# EAGLE board CT_schematic (EAGLE 7.6.0)

Size 100 x 80 mm. Coordinates in mm from the lower left corner, seen from the top.
Outline: 0,0 100,0 100,80 0,80 0,0
Copper layers (1*16): Top 0.035mm / dielectric 1.5mm / Bottom 0.035mm
Design rules "default": minimum track width 10mil, minimum drill 24mil, track to track 8mil, track to pad 8mil, pad to pad 8mil, via to via 8mil, smd to smd 8mil, copper to edge 40mil, drill to drill 8mil, minimum pad ring 10mil, minimum via ring 8mil, stop-mask expansion 4mil, vias tented up to drill 0mil, thermal gap 10mil

## Footprints (pad centres in the part's own frame; a part is rotated, then mirrored left to right if it is on the bottom)
C0603 = smd 0.8 x 0.8: 1 -0.762,0; 2 0.762,0
C0402 = smd 0.5 x 0.5: 1 -0.508,0; 2 0.508,0
C1206 = smd 1.3 x 1.6: 1 -1.524,0; 2 1.524,0
C0805 = smd 1.2 x 1.3: 1 -1.016,0; 2 1.016,0
C1210 = smd 1.2 x 2.5: 1 -1.524,0; 2 1.524,0
EXV-9H = smd 3.505 x 1.676: 1 -2.857,0; 2 2.857,0
L0603 = smd 0.8 x 0.8: 1 -0.762,0; 2 0.762,0
PJ-037B_PACKAGE = drill 3.7 square: 1 12,0 | drill 3.2 square: 2 6,0
R0603 = smd 0.8 x 0.8: 1 -0.762,0; 2 0.762,0
UFBGA100 = smd 0.28 x 0.28: A1 -2.75,2.75; A2 -2.25,2.75; A3 -1.75,2.75; A4 -1.25,2.75; A5 -0.75,2.75; A6 -0.25,2.75; A7 0.25,2.75; A8 0.75,2.75; A9 1.25,2.75; A10 1.75,2.75; A11 2.25,2.75; A12 2.75,2.75; B1 -2.75,2.25; B2 -2.25,2.25; B3 -1.75,2.25; B4 -1.25,2.25; B5 -0.75,2.25; B6 -0.25,2.25; B7 0.25,2.25; B8 0.75,2.25; B9 1.25,2.25; B10 1.75,2.25; B11 2.25,2.25; B12 2.75,2.25; C1 -2.75,1.75; C2 -2.25,1.75; C3 -1.75,1.75; C4 -1.25,1.75; C5 -0.75,1.75; C8 0.75,1.75; C9 1.25,1.75; C10 1.75,1.75; C11 2.25,1.75; C12 2.75,1.75; D1 -2.75,1.25; D2 -2.25,1.25; D3 -1.75,1.25; D10 1.75,1.25; D11 2.25,1.25; D12 2.75,1.25; E1 -2.75,0.75; E2 -2.25,0.75; E3 -1.75,0.75; E10 1.75,0.75; E11 2.25,0.75; E12 2.75,0.75; F1 -2.75,0.25; F2 -2.25,0.25; F11 2.25,0.25; F12 2.75,0.25; G1 -2.75,-0.25; G2 -2.25,-0.25; G11 2.25,-0.25; G12 2.75,-0.25; H1 -2.75,-0.75; H2 -2.25,-0.75; H3 -1.75,-0.75; H10 1.75,-0.75; H11 2.25,-0.75; H12 2.75,-0.75; J1 -2.75,-1.25; J2 -2.25,-1.25; J3 -1.75,-1.25; J10 1.75,-1.25; J11 2.25,-1.25; J12 2.75,-1.25; K1 -2.75,-1.75; K2 -2.25,-1.75; K3 -1.75,-1.75; K4 -1.25,-1.75; K5 -0.75,-1.75; K8 0.75,-1.75; K9 1.25,-1.75; K10 1.75,-1.75; K11 2.25,-1.75; K12 2.75,-1.75; L1 -2.75,-2.25; L2 -2.25,-2.25; L3 -1.75,-2.25; L4 -1.25,-2.25; L5 -0.75,-2.25; L6 -0.25,-2.25; L7 0.25,-2.25; L8 0.75,-2.25; L9 1.25,-2.25; L10 1.75,-2.25; L11 2.25,-2.25; L12 2.75,-2.25; M1 -2.75,-2.75; M2 -2.25,-2.75; M3 -1.75,-2.75; M4 -1.25,-2.75; M5 -0.75,-2.75; M6 -0.25,-2.75; M7 0.25,-2.75; M8 0.75,-2.75; M9 1.25,-2.75; M10 1.75,-2.75; M11 2.25,-2.75; M12 2.75,-2.75
SOIC-8 = smd 1.6 x 0.6: 1 -2.7,1.905 | smd 1.55 x 0.6: 2 -2.7,0.635; 3 -2.7,-0.635; 4 -2.7,-1.905; 5 2.7,-1.905; 6 2.7,-0.635; 7 2.7,0.635; 8 2.7,1.905
SAMTEC_FTSH-105-01-L-DV-K = smd 0.762 x 2.794: 1 -2.54,-2.032; 2 -2.54,2.032; 3 -1.27,-2.032; 4 -1.27,2.032; 5 0,-2.032; 6 0,2.032; 7 1.27,-2.032; 8 1.27,2.032; 9 2.54,-2.032; 10 2.54,2.032
QFN-32 = smd 0.6 x 0.3: 1 -2.3,1.75; 2 -2.3,1.25; 3 -2.3,0.75; 4 -2.3,0.25; 5 -2.3,-0.25; 6 -2.3,-0.75; 7 -2.3,-1.25; 8 -2.3,-1.75; 17 2.3,-1.75; 18 2.3,-1.25; 19 2.3,-0.75; 20 2.3,-0.25; 21 2.3,0.25; 22 2.3,0.75; 23 2.3,1.25; 24 2.3,1.75 | smd 0.3 x 0.6: 9 -1.75,-2.3; 10 -1.25,-2.3; 11 -0.75,-2.3; 12 -0.25,-2.3; 13 0.25,-2.3; 14 0.75,-2.3; 15 1.25,-2.3; 16 1.75,-2.3; 25 1.75,2.3; 26 1.25,2.3; 27 0.75,2.3; 28 0.25,2.3; 29 -0.25,2.3; 30 -0.75,2.3; 31 -1.25,2.3; 32 -1.75,2.3 | smd 3.2 x 3.2: EXP 0,0
SJ-43515TS-SMT-TR = smd 2.2 x 3: 1 0.6,-7.4; 4 3.4,-7.4 | smd 3 x 3: 2 12.8,-7.4; 5 17,-3 | smd 2 x 3: 3 5.3,0; 6 2.5,0 | drill 1.8: P$7 4.5,-3.69; P$8 11.54,-3.69
WM-64PC = drill 0.6 pad 1: 1 -1,0.95; 2 -1,-0.95
ASEK = smd 1.4 x 1: 1 -1.1,-0.8; 2 1.1,-0.8; 3 1.1,0.8; 4 -1.1,0.8
ASFL1 = smd 1.7 x 1.5: 1 -1.27,-1.1; 2 1.27,-1.1; 3 1.27,1.1; 4 -1.27,1.1
WSON-8 = smd 0.3 x 0.6: 1 -0.75,0; 2 0.05,0; 3 0.85,0; 4 1.65,0; 5 1.65,3.8; 6 0.85,3.8; 7 0.05,3.8; 8 -0.75,3.8 | smd 3 x 2.6: PAD 0.45,1.9
SON-6 = smd 0.55 x 0.3: 1 -0.355,0.5 | smd 0.52 x 0.3: 2 -0.37,0; 3 -0.37,-0.5; 4 0.37,-0.5; 5 0.37,0; 6 0.37,0.5
SW_4-1437565-2 = smd 1.4 x 2.1: 1 -2.23,4.55; 2 -2.23,-4.55; 3 2.23,4.55; 4 2.23,-4.55
LGM67K-G1J2-24-Z = smd 0.8 x 1.4: A -2,0; C 0,0
NC7SZ125M5X = smd 1.3 x 0.7: 1 -1.3,0.95; 2 -1.3,0; 3 -1.3,-0.95; 4 1.3,-0.95; 5 1.3,0.95
DUMMY_PACKAGE_172 = drill 0.3: 1 0,-1; 2 1.5,-1; 3 3,-1

## Placement (x,y rotation side)
C1  1e-07  [C0603]  -73.66,73.66 0 top  (outside the outline)
C2  1e-07  [C0603]  -77.47,73.66 0 top  (outside the outline)
C3  1e-07  [C0603]  -81.28,73.66 0 top  (outside the outline)
C4  1e-07  [C0603]  -15.24,78.74 0 top  (outside the outline)
C5  1e-07  [C0603]  -19.05,78.74 0 top  (outside the outline)
C6  4.7e-06  [C0603]  -69.85,73.66 0 top  (outside the outline)
C7  1e-07  [C0603]  -22.86,78.74 0 top  (outside the outline)
C8  1e-08  [C0603]  -26.67,78.74 0 top  (outside the outline)
C9  1e-06  [C0603]  -30.48,78.74 0 top  (outside the outline)
C10  1e-08  [C0402]  -38.1,83.82 0 top  (outside the outline)
C11  1e-07  [C0402]  -41.91,83.82 0 top  (outside the outline)
C12  1e-06  [C0603]  -34.29,78.74 0 top  (outside the outline)
C13  1e-06  [C0603]  -38.1,78.74 0 top  (outside the outline)
C14  1e-06  [C0603]  -41.91,78.74 0 top  (outside the outline)
C15  1e-06  [C0603]  -45.72,78.74 0 top  (outside the outline)
C16  1e-06  [C0603]  -49.53,78.74 0 top  (outside the outline)
C17  1e-06  [C0603]  -53.34,78.74 0 top  (outside the outline)
C18  1e-06  [C0603]  -57.15,78.74 0 top  (outside the outline)
C19  1e-07  [C0402]  -45.72,83.82 0 top  (outside the outline)
C20  1e-07  [C0402]  -49.53,83.82 0 top  (outside the outline)
C21  1e-07  [C0402]  -53.34,83.82 0 top  (outside the outline)
C22  1e-07  [C0402]  -57.15,83.82 0 top  (outside the outline)
C23  1e-06  [C0603]  -60.96,78.74 0 top  (outside the outline)
C24  1e-08  [C0402]  -60.96,83.82 0 top  (outside the outline)
C25  1e-08  [C0402]  -64.77,83.82 0 top  (outside the outline)
C26  1e-08  [C0402]  -68.58,83.82 0 top  (outside the outline)
C27  1e-08  [C0402]  -72.39,83.82 0 top  (outside the outline)
C28  1e-05  [C1206]  -45.72,66.04 0 top  (outside the outline)
C29  1e-05  [C0805]  -69.85,66.04 0 top  (outside the outline)
C30  1e-08  [C0402]  -76.2,83.82 0 top  (outside the outline)
C31  1e-05  [C1206]  -52.07,66.04 0 top  (outside the outline)
C32  1e-05  [C1210]  -39.37,66.04 0 top  (outside the outline)
C33  1e-07  [C0402]  -80.01,83.82 0 top  (outside the outline)
C34  0.0001  [EXV-9H]  -73.66,57.15 0 top  (outside the outline)
C35  0.0001  [EXV-9H]  -17.78,67.31 0 top  (outside the outline)
C36  1e-08  [C0402]  -15.24,88.9 0 top  (outside the outline)
C37  1e-08  [C0402]  -19.05,88.9 0 top  (outside the outline)
F1  240.0  [L0603]  -64.77,78.74 0 top  (outside the outline)
J1  PJ-037B  [PJ-037B_PACKAGE]  -27.94,35.56 0 top  (outside the outline)
R2  1000.0  [R0603]  -68.58,78.74 0 top  (outside the outline)
R4  4700.0  [R0603]  -72.39,78.74 0 top  (outside the outline)
R5  10000.0  [R0603]  -25.4,73.66 0 top  (outside the outline)
R6  10000.0  [R0603]  -30.48,73.66 0 top  (outside the outline)
R7  10000.0  [R0603]  -35.56,73.66 0 top  (outside the outline)
R8  10000.0  [R0603]  -40.64,73.66 0 top  (outside the outline)
R9  10000.0  [R0603]  -45.72,73.66 0 top  (outside the outline)
R10  10000.0  [R0603]  -50.8,73.66 0 top  (outside the outline)
R11  10000.0  [R0603]  -55.88,73.66 0 top  (outside the outline)
R12  5.0  [R0603]  -76.2,78.74 0 top  (outside the outline)
R13  1270.0  [R0603]  -80.01,78.74 0 top  (outside the outline)
R14  1270.0  [R0603]  -15.24,83.82 0 top  (outside the outline)
R15  100000.0  [R0603]  -74.93,64.77 0 top  (outside the outline)
R16  200.0  [R0603]  -19.05,83.82 0 top  (outside the outline)
R17  1000.0  [R0603]  -22.86,83.82 0 top  (outside the outline)
R18  100000.0  [R0603]  -80.01,64.77 0 top  (outside the outline)
R19  2231.0  [R0603]  -26.67,83.82 0 top  (outside the outline)
R20  1000.0  [R0603]  -30.48,83.82 0 top  (outside the outline)
R21  10000.0  [R0603]  -60.96,73.66 0 top  (outside the outline)
R22  10000.0  [R0603]  -66.04,73.66 0 top  (outside the outline)
R23  9100.0  [R0603]  -34.29,83.82 0 top  (outside the outline)
R24  680000.0  [R0603]  -15.24,73.66 0 top  (outside the outline)
R25  120000.0  [R0603]  -20.32,73.66 0 top  (outside the outline)
U1  STM32L151VCH6  [UFBGA100]  -60.96,35.56 0 top  (outside the outline)
U2  AT25080B-SSHL-T  [SOIC-8]  -39.37,46.99 0 top  (outside the outline)
U3  FTSH-105-01-L-DV-K  [SAMTEC_FTSH-105-01-L-DV-K]  -35.56,7.62 0 top  (outside the outline)
U4  SGTL5000XNAA3  [QFN-32]  -22.86,48.26 0 top  (outside the outline)
U5  SJ-43515TS-SMT-TR  [SJ-43515TS-SMT-TR]  -68.58,10.16 0 top  (outside the outline)
U6  SJ-43515TS-SMT-TR  [SJ-43515TS-SMT-TR]  -39.37,24.13 0 top  (outside the outline)
U7  SJ-43515TS-SMT-TR  [SJ-43515TS-SMT-TR]  -67.31,24.13 0 top  (outside the outline)
U8  WM-64PCT  [WM-64PC]  -71.12,34.29 0 top  (outside the outline)
U9  ASEK-32.768KHz-ECST  [ASEK]  -64.77,57.15 0 top  (outside the outline)
U10  ASFL-24.57MHZ-NCS  [ASFL1]  -27.94,58.42 0 top  (outside the outline)
U11  ASFL1-25MHZ-NCS  [ASFL1]  -44.45,58.42 0 top  (outside the outline)
U12  LP3878SDX-ADJ/NOPB  [WSON-8]  -60.96,45.72 0 top  (outside the outline)
U13  LP3878SDX-ADJ/NOPB  [WSON-8]  -81.28,45.72 0 top  (outside the outline)
U14  TPS3895ADRYR  [SON-6]  -27.94,87.63 0 top  (outside the outline)
U15  4-1437565-2  [SW_4-1437565-2]  -44.45,35.56 0 top  (outside the outline)
U16  Q65110A2395  [LGM67K-G1J2-24-Z]  -27.94,66.04 0 top  (outside the outline)
U17  nc7sz125m5x  [NC7SZ125M5X]  -57.15,64.77 0 top  (outside the outline)
U18  nc7sz125m5x  [NC7SZ125M5X]  -63.5,64.77 0 top  (outside the outline)
U19  Dummy  [DUMMY_PACKAGE_172]  -25.4,88.9 0 top  (outside the outline)

## Library data of the parts
C1-C37 F1 J1 R2 R4-R25 U1-U19 = circuit_tree

## Nets
CLK_U1_D1: U1.D1 U9.3
CLK_U1_F1: U1.F1 U11.3
CLK_U4_21: U4.21 U10.3
GND: C1.2 C2.2 C3.2 C4.2 C5.2 C6.2 C7.2 C8.2 C9.2 C10.2 C11.2 C19.2 C20.2 C21.2 C22.2 C23.2 C24.2 C25.2 C26.2 C27.2 C28.2 C29.2 C30.2 C31.2 C32.2 C33.2 C34.2 C35.2 C36.2 C37.2 J1.2 R2.2 R5.2 R12.2 R14.2 R17.2 R20.2 R23.2 R25.2 U1.D3 U1.E3 U1.F2 U1.F11 U1.F12 U1.J1 U1.K1 U2.4 U3.3 U3.5 U4.1 U4.3 U4.7 U4.EXP U6.1 U7.1 U8.2 U9.2 U10.2 U11.2 U12.3 U12.PAD U13.3 U13.PAD U14.2 U16.C U17.2 U17.3 U18.1 U18.3 U19.1
NET_U1_A4: R5.1 U1.A4
NET_U1_E2: C7.1 U1.E2
NET_U1_H2: R4.1 U1.H2 U18.4
NET_U1_M1: C8.1 C9.1 F1.1 U1.L1 U1.M1
NET_U1_M11: U16.A
NET_U1_M12: U15.3 U15.4
NET_U2_3: R6.1 U2.3
NET_U2_7: R8.1 U2.7
NET_U3_9: R12.1 U3.9
NET_U4_10: C22.1 U4.10
NET_U4_29: R13.1 U4.29
NET_U4_31: R14.1 U4.31
NET_U5_1: U4.4 U5.1
NET_U5_2: U4.2 U5.2
NET_U5_5: U4.6 U5.5
NET_U6_2: C13.1 U6.2
NET_U6_5: C12.1 U6.5
NET_U6_11: C13.2
NET_U6_12: C12.2
NET_U7_2: C15.1 C16.1 U7.2
NET_U7_5: C14.1 U7.5
NET_U7_13: C15.2 C16.2
NET_U7_14: C14.2
NET_U8_1: C17.1 C18.1 C23.1 U4.16 U8.1
NET_U8_15: C17.2 C18.2
NET_U12_1: C27.1 U12.1
NET_U12_6: R16.2 R17.1 U12.6
NET_U12_8: R15.1 U12.8
NET_U13_1: C30.1 U13.1
NET_U13_6: R19.2 R20.1 U13.6
NET_U13_8: R18.1 U13.8
NET_U14_1: R22.1 R23.1 U14.1
NET_U14_3: R24.2 R25.1 U14.3
NET_U14_4: R21.1 U14.4 U17.4 U18.2
NET_U15_1: R2.1 U15.1 U15.2
PROC_I2S2_CK: U1.B9 U4.24
PROC_I2S2_SD: U1.B7 U4.26
PROC_I2S2_WS: U1.C9 U4.23
PROC_PE1: U1.A2 U19.3
PROC_PE3: U1.A1 U19.2
PROC_SPI1_MISO: U1.A7 U2.2
PROC_SPI1_MOSI: U1.A12 U2.5
PROC_SPI1_NSS: R7.1 U1.A9 U2.1
PROC_SPI1_SCK: U1.K4 U2.6
PROC_SYS_JTCK_SWCLK: R10.1 U1.A10 U3.4
PROC_SYS_JTDO_TRACESWO: U1.A8 U3.6
PROC_SYS_JTMS_SWDIO: R11.1 U1.A11 U3.2
RST_OUT_U3_JTAG_RST_B: R9.1 U3.10 U17.1
VCC_S1_9V9: C28.1 C31.1 C34.1 C35.1 J1.1 R15.2 R18.2 U12.4 U13.4
VCC_TIER1_1V2: C19.1 C29.1 R16.1 U4.30 U12.5
VCC_TIER1_3V3: C1.1 C2.1 C3.1 C4.1 C5.1 C6.1 C10.1 C11.1 C20.1 C21.1 C24.1 C25.1 C26.1 C32.1 C33.1 C36.1 C37.1 F1.2 R4.2 R6.2 R7.2 R8.2 R9.2 R10.2 R11.2 R13.2 R19.1 R21.2 R22.2 R24.1 U1.C4 U1.G2 U1.G11 U1.G12 U1.H3 U2.8 U3.1 U4.5 U4.20 U9.4 U10.4 U11.4 U13.5 U14.6 U17.5 U18.5

## Tracks (layer width: path | path; a pad name or v marks a point on that pad's centre or on a via)
CLK_U1_D1  (1 unrouted)
CLK_U1_F1  (1 unrouted)
CLK_U4_21  (1 unrouted)
GND  (69 unrouted)
NET_U1_A4  (1 unrouted)
NET_U1_E2  (1 unrouted)
NET_U1_H2  (2 unrouted)
NET_U1_M1  (4 unrouted)
NET_U1_M12  (1 unrouted)
NET_U2_3  (1 unrouted)
NET_U2_7  (1 unrouted)
NET_U3_9  (1 unrouted)
NET_U4_10  (1 unrouted)
NET_U4_29  (1 unrouted)
NET_U4_31  (1 unrouted)
NET_U5_1  (1 unrouted)
NET_U5_2  (1 unrouted)
NET_U5_5  (1 unrouted)
NET_U6_2  (1 unrouted)
NET_U6_5  (1 unrouted)
NET_U7_2  (2 unrouted)
NET_U7_5  (1 unrouted)
NET_U7_13  (1 unrouted)
NET_U8_1  (4 unrouted)
NET_U8_15  (1 unrouted)
NET_U12_1  (1 unrouted)
NET_U12_6  (2 unrouted)
NET_U12_8  (1 unrouted)
NET_U13_1  (1 unrouted)
NET_U13_6  (2 unrouted)
NET_U13_8  (1 unrouted)
NET_U14_1  (2 unrouted)
NET_U14_3  (2 unrouted)
NET_U14_4  (3 unrouted)
NET_U15_1  (2 unrouted)
PROC_I2S2_CK  (1 unrouted)
PROC_I2S2_SD  (1 unrouted)
PROC_I2S2_WS  (1 unrouted)
PROC_PE1  (1 unrouted)
PROC_PE3  (1 unrouted)
PROC_SPI1_MISO  (1 unrouted)
PROC_SPI1_MOSI  (1 unrouted)
PROC_SPI1_NSS  (2 unrouted)
PROC_SPI1_SCK  (1 unrouted)
PROC_SYS_JTCK_SWCLK  (2 unrouted)
PROC_SYS_JTDO_TRACESWO  (1 unrouted)
PROC_SYS_JTMS_SWDIO  (2 unrouted)
RST_OUT_U3_JTAG_RST_B  (2 unrouted)
VCC_S1_9V9  (8 unrouted)
VCC_TIER1_1V2  (4 unrouted)
VCC_TIER1_3V3  (45 unrouted)